# Altium PCB CAM-PCB.PcbDoc
Units mm, origin at the board's own origin, x right, y up, seen from the top; angles counter-clockwise.
Board outline 38.1 x 45.5 mm, 2 copper layers (Top Layer, Bottom Layer); 4 components, 8 nets, 47 pads, 2 vias.
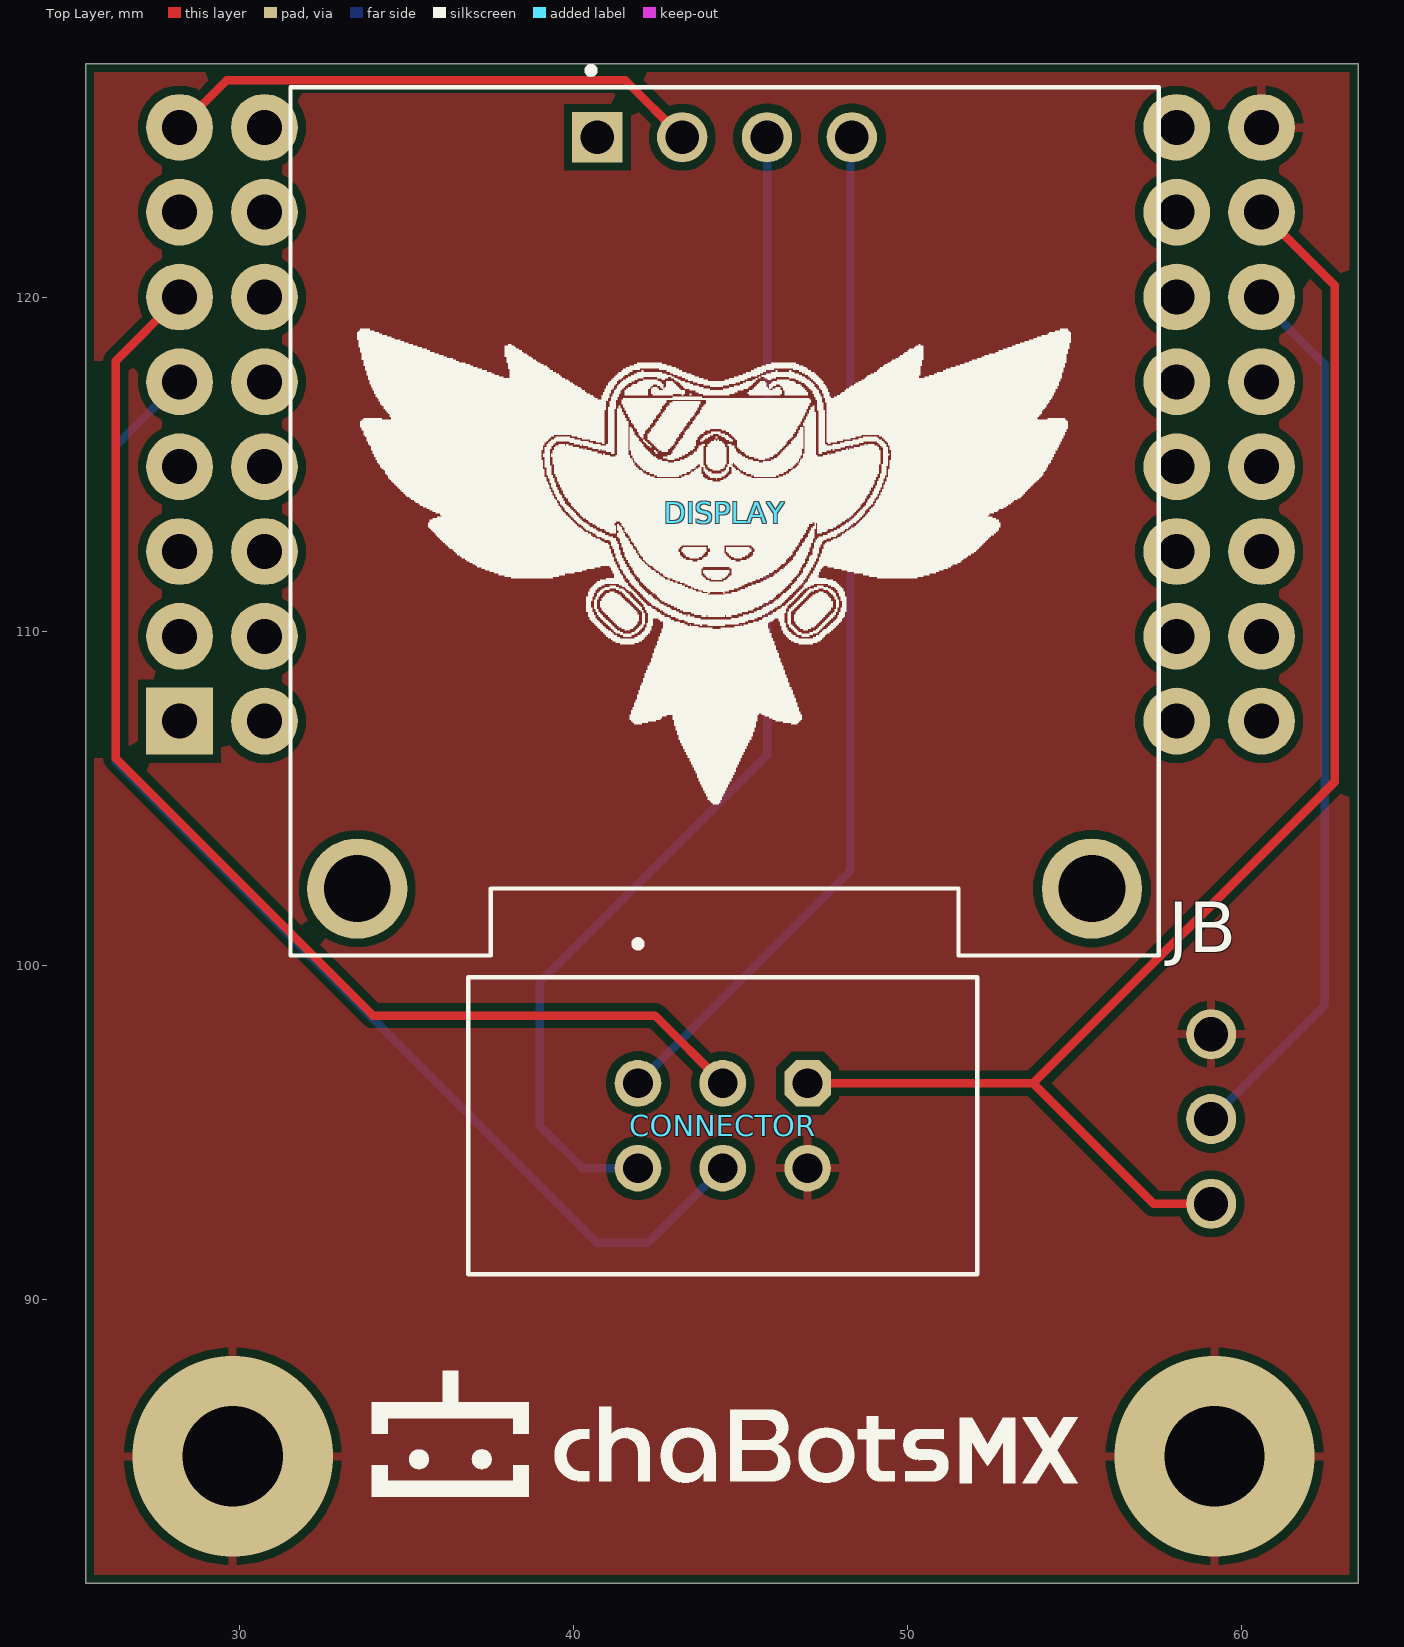
[diagram p0: Top Layer view]
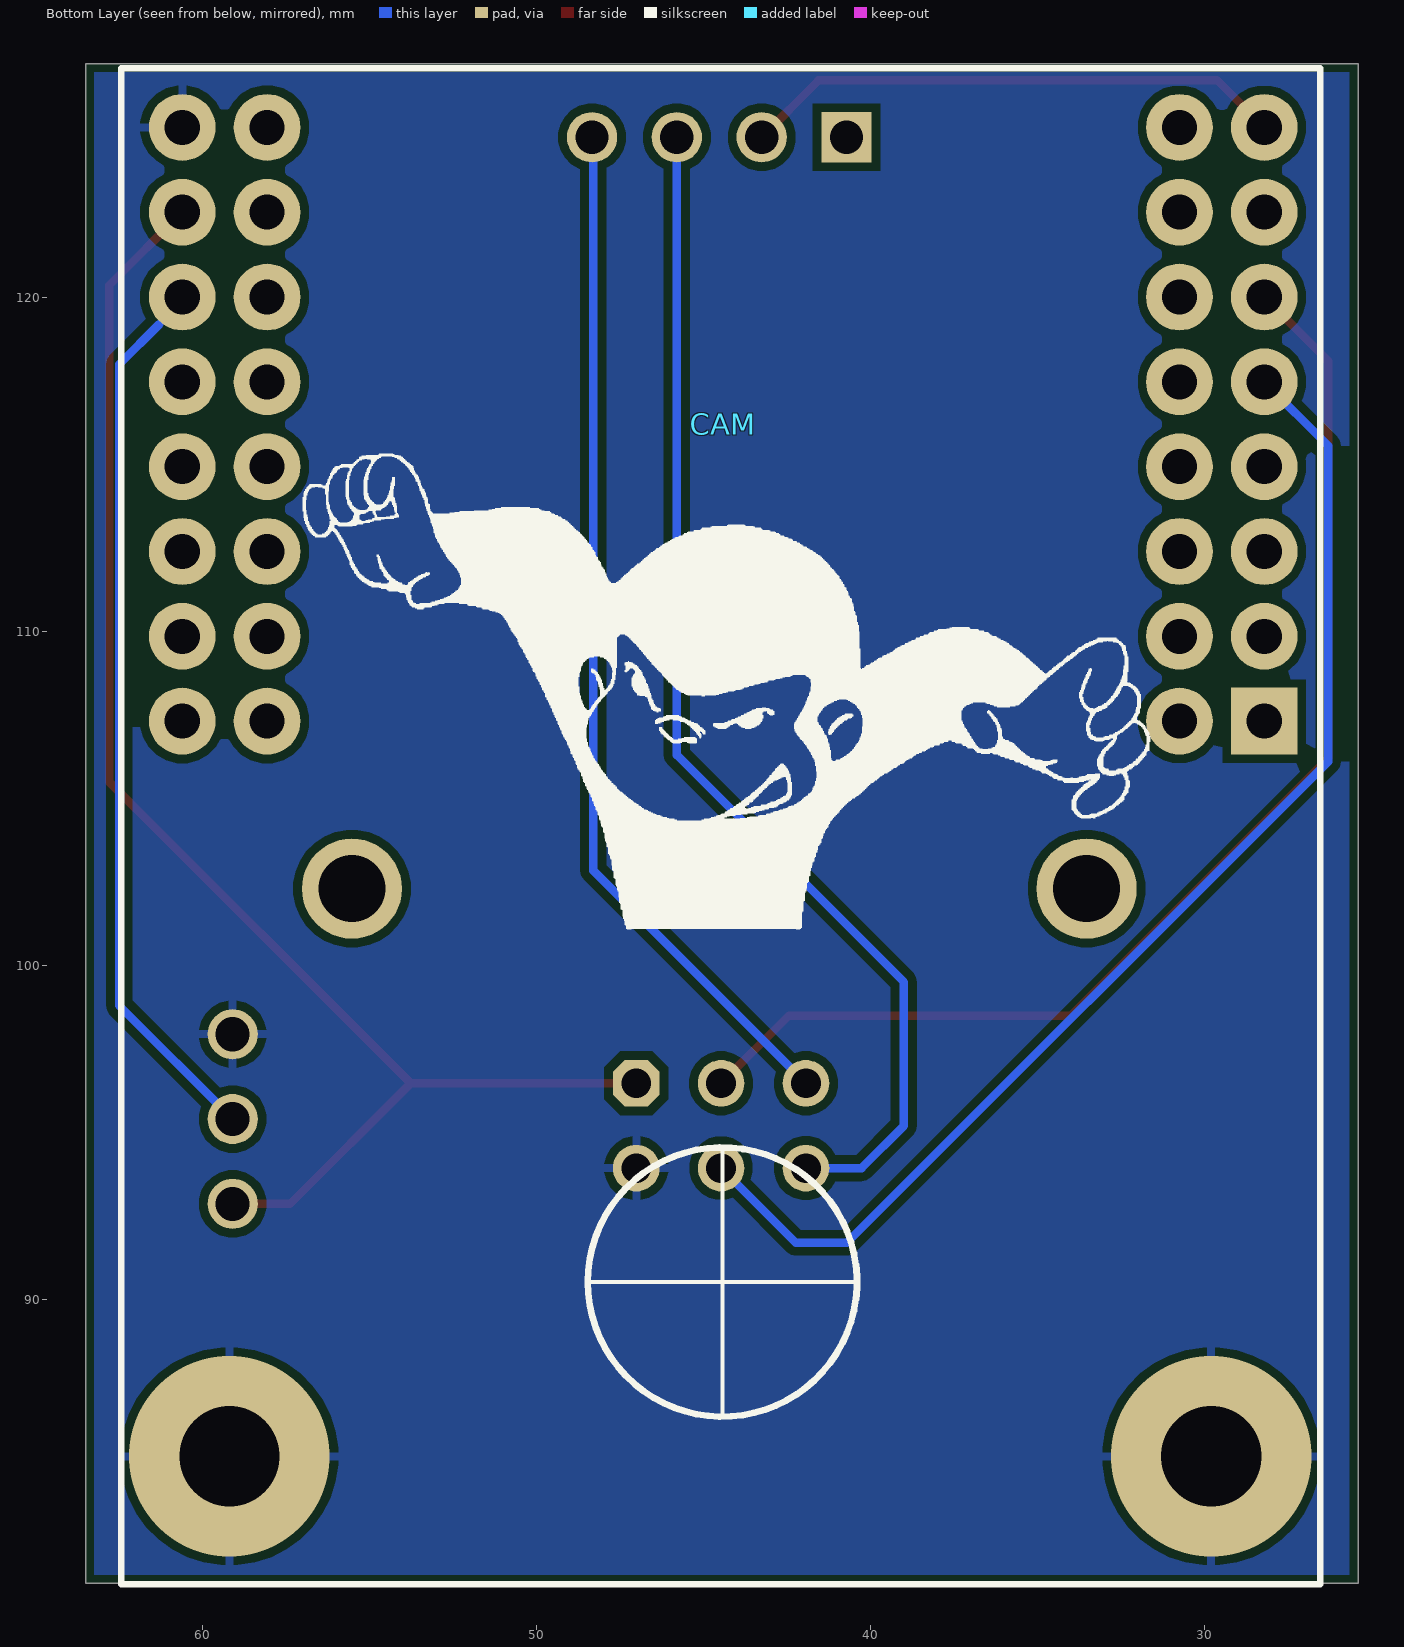
[diagram p1: Bottom Layer view, seen from below]

## Layer stack, top to bottom
Top Solder: solder mask 0.0102, Solder Resist, Dk 3.5
Top Layer: signal copper 0.0356
Dielectric 1: dielectric 0.32, FR-4, Dk 4.8
Bottom Layer: signal copper 0.0356
Bottom Solder: solder mask 0.0102, Solder Resist, Dk 3.5

## Board outline
25.4,81.5 25.4,127 63.5,127 63.5,81.5

## Design rules (kind name [scope] priority, off if disabled: settings)
BoardOutlineClearance [All] p1: gap=0.254 ignorepadtopadclearanceinfootprint=FALSE except(0: Arc-SplitContinuation Track-SplitContinuation SMDPad-SplitContinuation THPad-SplitContinuation Via-SplitContinuation Fill-SplitContinuation Poly-SplitContinuation Region-SplitContinuation Text-SplitContinuation)
Clearance [All] p1: gap=0.254 ignorepadtopadclearanceinfootprint=FALSE
ComponentClearance [All] p1 off: gap=0.254 collisioncheckmode=3 verticalgap=0.254 showdistances=FALSE
Height [All] p1 off: minheight=0 maxheight=25.4 prefheight=12.7
PolygonConnect [All] p1: connectstyle=Relief reliefconductorwidth=0.254 reliefentries=4 polygonreliefangle="90 Angle" airgapwidth=0.254
RoutingVias [All] p1: holewidth=0.711 width=1.27 viastyle="Through Hole" minholewidth=0.711 minwidth=1.27 maxholewidth=0.711 maxwidth=1.27
SolderMaskExpansion [All] p1: expansion=0.102 istentingtop=FALSE
SupplyNets "Schematic Supply Nets_2" [InNet('+3V')] p1: voltage=0.000
SupplyNets "Schematic Supply Nets_1" [InNet('+5V')] p2: voltage=0.000
SupplyNets "Schematic Supply Nets" [InNet('GND')] p3: voltage=0.000
Width [All] p1: maxlimit=0.254 minlimit=0.254 preferedwidth=0.254
28 further rules are at their usual default settings.

## Components (designator, comment, footprint, x,y, rotation, side; value= is the part's Value field where it differs from the comment)
CAM "OpenMV-TH" OPENMV-TH 44.435,90.52 r0 bottom
CONNECTOR "IDC-6PIN-TH-2.54" IDC-6PIN-TH-2.54 44.5,95.2 r270 top
DISPLAY "I2C-Display-TH" I2C-DISPLAY-TH 44.53,113.3 r0 top
JB "3PIN" 3PIN 59.1,95.4 r90 top

## Footprints (in the part's own frame and the unit in brackets; to place one, negate y for a bottom-side part, rotate by r counter-clockwise, add the part's x,y. Pads: shape width x height; smd on the part's side, far side on the other; paste and mask are expansions set on the pad)
3PIN [mm]
  round 1.5 hole 1.02: 1(-2.54,0) 2(0,0) 3(2.54,0)
I2C-DISPLAY-TH [mm]
  rect 1.508x1.508 / inner round 1.508 / far side rect 1.508x1.508 hole 1: 1(-3.81,11.5)
  round 1.508 hole 1: 2(-1.27,11.5) 3(1.27,11.5) 4(3.81,11.5)
  round 3 hole 2: S3(11,-11) S4(-11,-11)
  silkscreen extent -13,-13 13,13.6, body extent -13,-13 13,13, height 5.66
IDC-6PIN-TH-2.54 [mm]
  oct 1.398x1.398 hole 0.89: 1(-1.27,2.515)
  round 1.398 hole 0.89: 2(-1.27,-0.025) 3(-1.27,-2.565) 4(1.27,-2.565) 5(1.27,-0.025) 6(1.27,2.515)
  silkscreen extent -5.54,-7.65 4.45,7.59, body extent -4.57,-7.64 4.53,7.58, height 9
OPENMV-TH [mm]
  rect 2x2 hole 1.05: 0(-16.225,-16.795)
  round 2 hole 1.05: 1(-16.225,-19.335) 2(-16.225,-21.875) 3(-16.225,-24.415) 3V(-16.225,-34.575) 3V-1(13.635,-34.575) 4(-16.225,-26.955) 5(-16.225,-29.495) 6(-16.225,-32.035) 7(16.175,-29.495) 8(16.175,-26.955) 9(16.175,-24.415) 10(16.175,-21.875) 13(13.635,-29.495) 14(13.635,-26.955) GND(-13.685,-34.575) GND1(16.175,-34.575) LED(-13.685,-16.795) R1(13.635,-16.795) R2(13.635,-19.335) R3(13.635,-21.875) R4(13.635,-24.415) RAW(-13.685,-32.035) RST(16.175,-16.795) RXN(-13.685,-19.335) RXP(-13.685,-21.875) SBL(13.635,-32.035) TOG(-13.685,-29.495) TXN(-13.685,-24.415) TXP(-13.685,-26.955) VIN(16.175,-32.035) WKE(16.175,-19.335)
  silkscreen extent -17.9,-36.35 18,9.05, body extent -17.73,-36.25 17.83,8.85, height 40.45

## Part data
JB: "2.54 Header"

## Via types
v1: diameter 6, hole 3, Top Layer to Bottom Layer, 2 vias

## Nets (pads, with @x,y where several pads share a name; then routed paths per layer and width w, separated by ;. In a path a pad name is that pad's centre, name@x,y a point inside that pad or via, vN(x,y) a via of type N, cw(c..) or ccw(c..) an arc to the next point about the centre after c; other vN are vias at no path point)
+3V: CAM.3V DISPLAY.2 | length 16.3
  Top Layer w0.254: CAM.3V 29.615,126.5 41.56,126.5 DISPLAY.2
+5V: CAM.VIN CONNECTOR.1 JB.1 | length 44.3
  Top Layer w0.254: CONNECTOR.1 53.77,96.47 ; JB.1 57.38,92.86 53.77,96.47 ; CAM.VIN 62.8,120.365 62.8,105.5 53.77,96.47
GND: CAM.GND1 CONNECTOR.6 JB.3
  other v1: 29.8,85.3 59.2,85.3
NEO: CAM.7 JB.2 | length 25.7
  Bottom Layer w0.254: JB.2 62.5,98.8 62.5,118 61.3,119.2
RX-CAM: CAM.5 CONNECTOR.2 | length 36.8
  Top Layer w0.254: CAM.5 26.3,118.105 26.3,106.2 34,98.5 42.445,98.5 CONNECTOR.2
SCL: CONNECTOR.4 DISPLAY.3 | length 35.9
  Bottom Layer w0.254: CONNECTOR.4 40.27,93.93 39,95.2 39,99.5 45.8,106.3 DISPLAY.3
SDA: CONNECTOR.3 DISPLAY.4 | length 31
  Bottom Layer w0.254: CONNECTOR.3 48.3,102.835 48.3,124.76 DISPLAY.4
TX-CAM: CAM.4 CONNECTOR.5 | length 37.2
  Bottom Layer w0.254: CAM.4 26.3,115.565 26.3,106.1 40.7,91.7 42.245,91.7 CONNECTOR.5
pads on no net: CAM.0 CAM.1 CAM.2 CAM.3 CAM.3V-1 CAM.6 CAM.8 CAM.9 CAM.10 CAM.13 CAM.14 CAM.GND CAM.LED CAM.R1 CAM.R2 CAM.R3 CAM.R4 CAM.RAW CAM.RST CAM.RXN CAM.RXP CAM.SBL CAM.TOG CAM.TXN CAM.TXP CAM.WKE DISPLAY.1 DISPLAY.S3 DISPLAY.S4

## Polygon pours and split planes (outlines as drawn)
GND on Top Layer "GND_L01_P000" (solid, pour order 0): 25.4,127 63.5,127 63.5,81.5 25.4,81.5
GND on Bottom Layer "GND_L02_P001" (solid, pour order 1): 25.4,127 63.5,127 63.5,81.5 25.4,81.5

## Silkscreen, mask and mechanical layers (free items; w line width, h text height)
Top Overlay:
  drawing of 42 lines, arcs and shapes, not listed
Bottom Overlay:
  drawing of 6 lines, arcs and shapes, not listed